# Altium PCB alarm.PcbDoc
Units mil, origin at the board's own origin, x right, y up, seen from the top; angles counter-clockwise.
Board outline 1655 x 625 mil, 2 copper layers (Top Layer, Bottom Layer); 8 components, 6 nets, 19 pads, 2 vias.
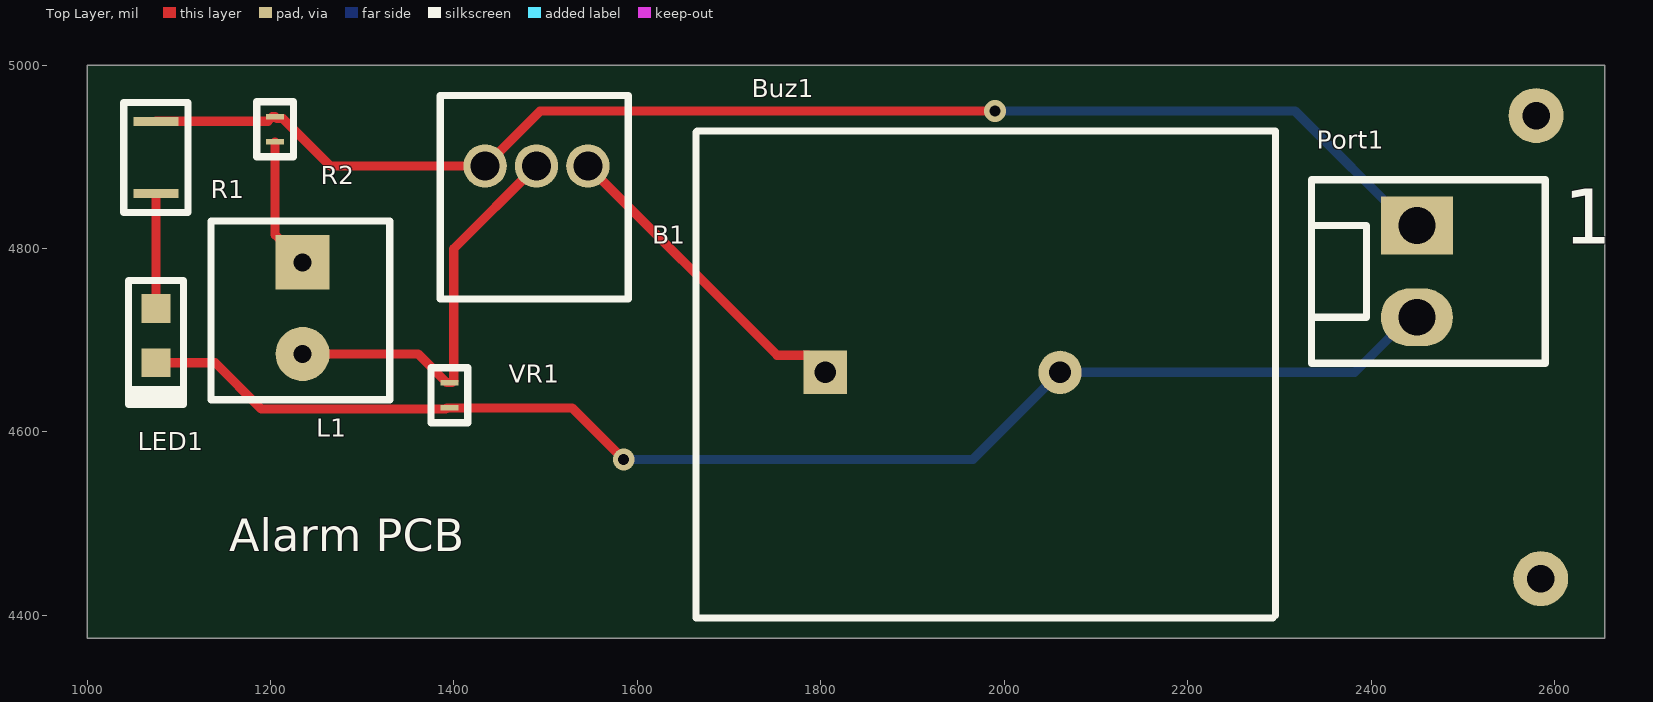
[diagram p0: Top Layer view]
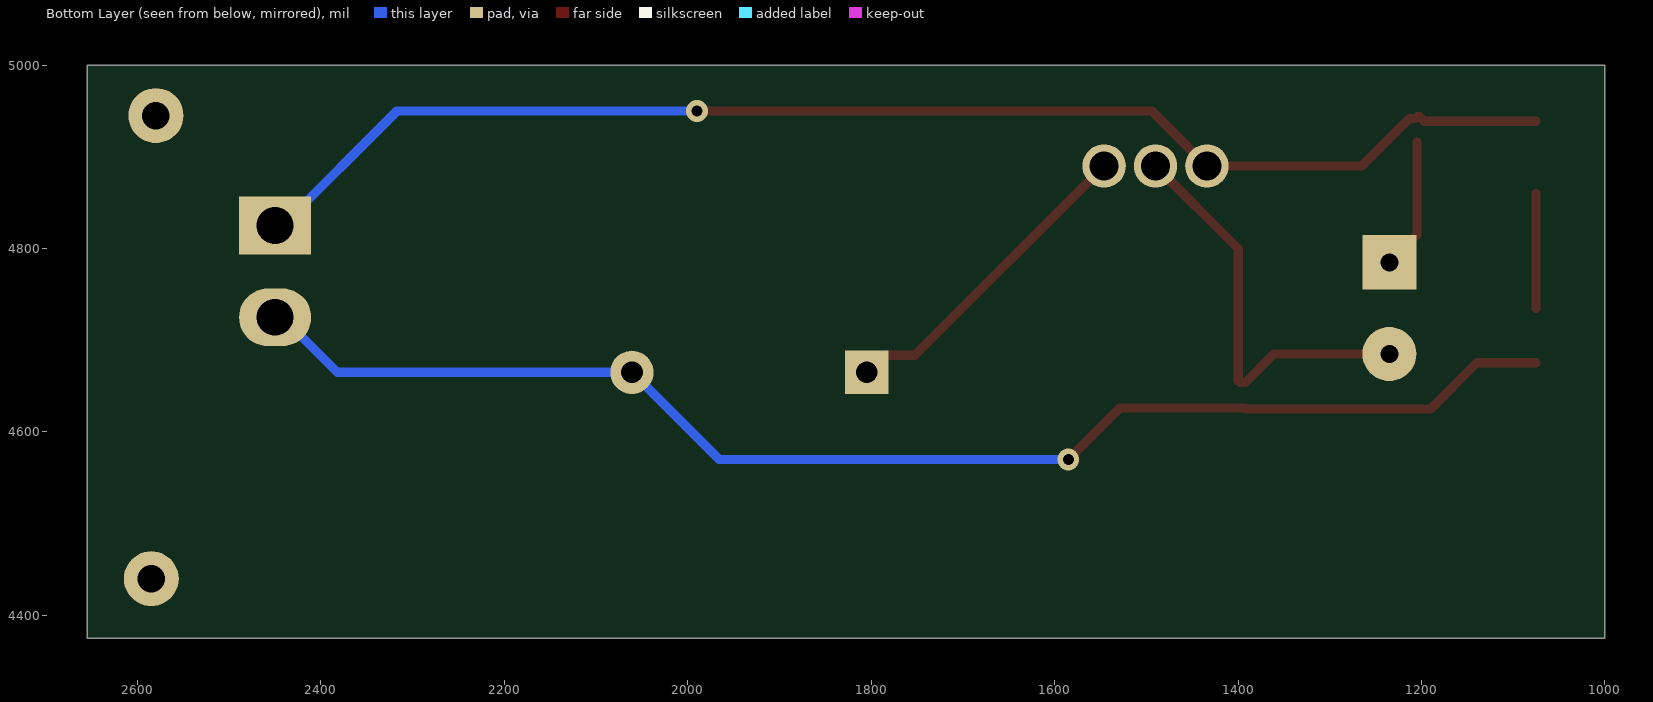
[diagram p1: Bottom Layer view, seen from below]
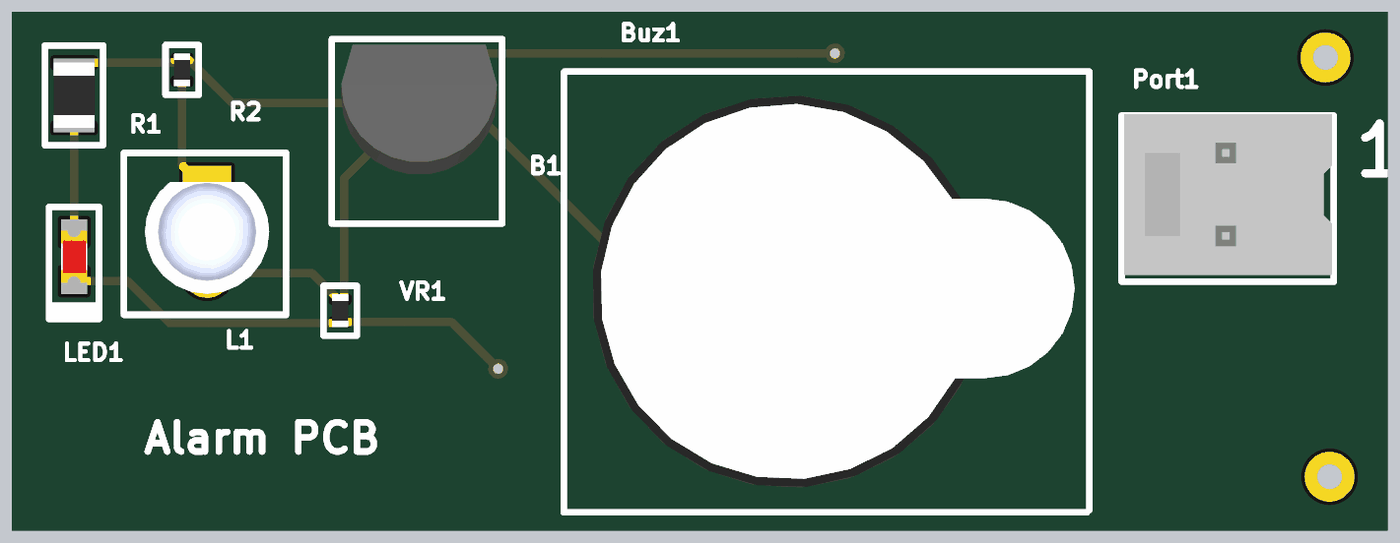
[diagram p2: 3D render of the assembled board from above, using the file's embedded part models]

## Layer stack, top to bottom
Top Solder: solder mask 0.4, Solder Resist, Dk 3.5
Top Layer: signal copper 1.4
Dielectric 1: dielectric 12.6, FR-4, Dk 4.8
Bottom Layer: signal copper 1.4
Bottom Solder: solder mask 0.4, Solder Resist, Dk 3.5

## Board outline
1000,4375 2655,4375 2655,5000 1000,5000

## Design rules (kind name [scope] priority, off if disabled: settings)
Clearance [All] p1: gap=10 ignorepadtopadclearanceinfootprint=FALSE except(0: Arc-Hole Track-Hole SMDPad-Hole THPad-Hole Via-Hole Fill-Hole Poly-Hole Region-Hole Text-Hole)
PolygonConnect [All] p1: connectstyle=Relief reliefconductorwidth=10 reliefentries=4 polygonreliefangle="90 Angle" airgapwidth=10
RoutingVias [All] p1: holewidth=28 width=50 viastyle="Through Hole" minholewidth=28 minwidth=50 maxholewidth=28 maxwidth=50
SolderMaskExpansion [All] p1: expansion=4
Width [All] p1: maxlimit=10 minlimit=10 preferedwidth=10
30 further rules are at their usual default settings.

## Components (designator, comment, footprint, x,y, rotation, side; value= is the part's Value field where it differs from the comment)
B1 "BC557" BJT 1490,4890 r90 top
Buz1 "Buzzer" Buz 1805,4665 r90 top
L1 "L14F1" phototransistor 1235,4785 r0 top
LED1 "Red" LED_red 1075,4705 r90 top
Port1 "Header 1x2" "Port 1x2" 2616,5067 r0 top
R1 "100 Ohms, 1/2W" "R100 - duplicate" 1075,4899.37 r270 top
R2 "1K Ohms" R1K 1205,4930 r270 top
VR1 "VR 50K" R1K 1395,4640 r270 top

## Footprints (in the part's own frame and the unit in brackets; to place one, negate y for a bottom-side part, rotate by r counter-clockwise, add the part's x,y. Pads: shape width x height; smd on the part's side, far side on the other; paste and mask are expansions set on the pad)
BJT [mm]
  round 1.2 hole 0.8: 3(0,1.422) 4(0,0) 5(0,-1.422)
  silkscreen extent -3.68,-2.54 1.96,2.67, body extent -3.37,-2.38 1.81,2.38, height 5.01
Buz [mm]
  rect 1.2x1.2 hole 0.6: 1(0,0)
  round 1.2 hole 0.6: 2(0,-6.5)
  silkscreen extent -6.81,-12.47 6.68,3.58, body extent -6.05,-12.03 5.95,2.72, height 8.56
LED_red [mm]
  rect 0.8x0.8 smd: A(-0.75,0) K(0.75,0)
  silkscreen extent -1.91,-0.76 1.52,0.76, body extent -0.8,-0.4 0.8,0.4, height 0.6
phototransistor [mm]
  rect 1.5x1.5 hole 0.5: 1(0,0)
  round 1.5 hole 0.5: 2(0,-2.54)
  silkscreen extent -2.54,-3.81 2.41,1.14, body extent -1.9,-3.17 1.9,0.26, height 5.21
"Port 1x2" [mm]
  rect 2x1.6 hole 1.02: 1(-4.216,-6.147)
  oval 2x1.6 hole 1.02: 2(-4.216,-8.687)
  silkscreen extent -7.14,-9.96 -0.66,-4.88, body extent -7.06,-9.75 -0.71,-4.83, height 10.68
R1K [mm]
  rect 0.15x0.5 smd: 1(-0.35,0) 2(0.35,0)
  silkscreen extent -0.76,-0.51 0.76,0.51, body extent -0.5,-0.25 0.5,0.25, height 0.34
"R100 - duplicate" [mm]
  rect 0.25x1.25 smd: 1(-1,0) 2(1,0)
  silkscreen extent -1.52,-0.89 1.52,0.89, body extent -1,-0.62 1,0.63, height 0.56

## Part data
B1: library part BC557BRL1G, "Trans GP BJT PNP 45V 0.1A 3-Pin TO-92 T/R", Case/Package=TO-92-3, Collector-emitter Voltage-Max=650mV, Collector Base Voltage (VCBO)=50V, Collector Emitter Breakdown Voltage=45V, Collector Emitter Saturation Voltage=-300mV, Current Rating=-100mA, Emitter Base Voltage (VEBO)=5V, Frequency=320MHz, Manufacturer="ON Semiconductor", Max Collector Current=100mA, Max Operating Temperature=150°C, Max Power Dissipation=625mW, Min Operating Temperature=-55°C, Package Quantity=1, Voltage Rating (DC)=-45V, Category="Discrete Semiconductor Products", Collector Emitter Voltage (VCEO)=45V, ComponentLink1Description=https://datasheet.ciiva.com/976/bc556b-d-976565.pdf?src-supplier=Digi-Key, ComponentLink1URL=https://datasheet.ciiva.com/976/bc556b-d-976565.pdf?src-supplier=Digi-Key, ComponentLink2Description=https://datasheet.ciiva.com/976/bc556b-d-976566.pdf?src-supplier=Digi-Key, ComponentLink2URL=https://datasheet.ciiva.com/976/bc556b-d-976566.pdf?src-supplier=Digi-Key, ComponentLink3Description=https://datasheet.ciiva.com/26816/getdatasheetpartid-53822-26816822.pdf?src-supplier=Verical, ComponentLink3URL=https://datasheet.ciiva.com/26816/getdatasheetpartid-53822-26816822.pdf?src-supplier=Verical, ComponentLink4Description=https://datasheet.ciiva.com/16379/bc556b-d-16379225.pdf?src-supplier=Future+Electronics, ComponentLink4URL=https://datasheet.ciiva.com/16379/bc556b-d-16379225.pdf?src-supplier=Future+Electronics, ComponentLink5Description=https://datasheet.ciiva.com/25996/bc556b-d-25996316.pdf?src-supplier=Avnet+Europe, ComponentLink5URL=https://datasheet.ciiva.com/25996/bc556b-d-25996316.pdf?src-supplier=Avnet+Europe, ComponentLink6Description=https://datasheet.ciiva.com/11204/bc556b-d-11204303.pdf?src-supplier=Avnet, ComponentLink6URL=https://datasheet.ciiva.com/11204/bc556b-d-11204303.pdf?src-supplier=Avnet, Contact Plating=Copper,Tin,Silver, Element Configuration=Single, Gain Bandwidth Product=320MHz, Height=5.33mm, hFE Min=180, Lead Free="Lead Free", Length=5.2mm, Manufacturer Part Number=BC557BRL1G, Max Breakdown Voltage=45V, Max Frequency=320MHz, Number of Elements=1, Number of Pins=3, Packaging="Tape and Reel", Polarity=PNP, Power Dissipation=625mW, Pricing 1="3206 = 0.11076, 3300 = 0.10920, 6500 = 0.10608, 17000 = 0.10374, 33000 = 0.09984, 170000 = 0.09750, 330000 = 0.09516 (USD)", Radiation Hardening=No, REACH SVHC="No SVHC", RoHS=Yes, RoHS Compliant=Yes, Series=-, Stock 1=122273, Supplier 1=Avnet, Supplier Part Number 1=BC557BRL1G, Transition Frequency=320MHz, Width=4.19mm
Buz1: library part AT-1224-TWT-5V-2-R, "AUDIO MAGNETIC XDCR 3-7V TH", Frequency=2.4kHz, Manufacturer="Projects Unlimited", Max Operating Temperature=70°C, Max Supply Current=40mA, Min Operating Temperature=-30°C, Supplier Part Number 1=668-1470-ND, Voltage Rating=5V, Category="Audio Products", ComponentLink1Description=http://www.mouser.com/ds/2/334/AT-1224-TWT-5V-2-R-532234.pdf?src-supplier=Mouser, ComponentLink1URL=http://www.mouser.com/ds/2/334/AT-1224-TWT-5V-2-R-532234.pdf?src-supplier=Mouser, ComponentLink2Description=http://www.puiaudio.com/pdf/AT-1224-TWT-5V-2-R.pdf?src-supplier=Digi-Key, ComponentLink2URL=http://www.puiaudio.com/pdf/AT-1224-TWT-5V-2-R.pdf?src-supplier=Digi-Key, ComponentLink3Description=http://www.puiaudio.com/pdf/AT-1224-TWT-5V-2-R.pdf?src-supplier=Avnet, ComponentLink3URL=http://www.puiaudio.com/pdf/AT-1224-TWT-5V-2-R.pdf?src-supplier=Avnet, Contact Plating=Tin, Diameter=12mm, Height=9mm, Manufacturer Part Number=AT-1224-TWT-5V-2-R, Mount="Through Hole", Operating Supply Current=40mA, Packaging=Tray, Pricing 1="1 = 0.61000, 10 = 0.52000, 25 = 0.48640, 40 = 0.46125, 100 = 0.43680, 500 = 0.38252, 1000 = 0.36032, 4900 = 0.31168 (USD)", RoHS=Yes, Sensing Method=Magnetic, Stock 1=74191, Supplier 1=Digi-Key, Termination="PC Pins"
L1: "Photodarlington Chip Silicon 940nm 3-Pin TO-18 Bulk", Breakdown Voltage=25V, Case/Package=TO-18, Current Rating=7.5mA, Dark Current=100nA, Manufacturer="ON Semiconductor / Fairchild", Max Operating Temperature=125°C, Max Power Dissipation=300mW, Min Operating Temperature=-65°C, Package Quantity=500, Power Dissipation=600mW, Supplier Part Number 1=1021141, Category=Phototransistor, Collector Emitter Breakdown Voltage=25V, Collector Emitter Voltage (VCEO)=25V, ComponentLink1Description=https://datasheet.ciiva.com/4270/l14f1-4270771.pdf?src-supplier=Arrow+Electronics, ComponentLink1URL=https://datasheet.ciiva.com/4270/l14f1-4270771.pdf?src-supplier=Arrow+Electronics, ComponentLink2Description=https://datasheet.ciiva.com/2821/l14f1-20l14f2-2821058.pdf?src-supplier=Digi-Key, ComponentLink2URL=https://datasheet.ciiva.com/2821/l14f1-20l14f2-2821058.pdf?src-supplier=Digi-Key, ComponentLink3Description=https://datasheet.ciiva.com/1249/94970-1249385.pdf?src-supplier=Element14, ComponentLink3URL=https://datasheet.ciiva.com/1249/94970-1249385.pdf?src-supplier=Element14, Fall Time=250us, Lead Free="Lead Free", Manufacturer Part Number=L14F1, Max Collector Current=7.5mA, Mount="Through Hole", Number of Elements=1, Number of Pins=3, Orientation="Top View", Packaging=Bulk, Polarity=NPN, Power Consumption=300mW, Pricing 1="1 = 2.73000, 25 = 1.92000, 100 = 1.33000, 1000 = 1.20000 (GBP)", Rise Time=300us, RoHS=Yes, RoHS Compliant=Yes, Stock 1=0, Supplier 1=Farnell, Viewing Angle=16°, Voltage Rating (DC)=25V, Wavelength=940nm
LED1: library part LTST-C191KRKT, "On a Reel of 5000, 2.4 V Red LED 1608 (0603) SMD, Lite-On LTST-C191KRKT", Case/Package=0603, Case Code (Metric)=1608, Forward Current=30mA, Forward Voltage=2V, Lens Color=Colorless, Manufacturer="Vishay Lite-On", Max Operating Temperature=85°C, Min Operating Temperature=-55°C, Package Quantity=1, Power Dissipation=75mW, Reverse Voltage=5V, Supplier Part Number 1=160-1447-1-ND, Test Current=20mA, Case Code (Imperial)=0603, Category=Optoelectronics, Color=Red, ComponentLink1Description=https://datasheet.ciiva.com/11773/0900766b80dc02b2-11773601.pdf?src-supplier=RSComponents, ComponentLink1URL=https://datasheet.ciiva.com/11773/0900766b80dc02b2-11773601.pdf?src-supplier=RSComponents, ComponentLink2Description=https://datasheet.ciiva.com/16212/ltst-c191krkt-16212419.pdf?src-supplier=Future+Electronics, ComponentLink2URL=https://datasheet.ciiva.com/16212/ltst-c191krkt-16212419.pdf?src-supplier=Future+Electronics, ComponentLink3Description=https://datasheet.ciiva.com/15117/getdatasheetpartid-141922-15117737.pdf?src-supplier=Verical, ComponentLink3URL=https://datasheet.ciiva.com/15117/getdatasheetpartid-141922-15117737.pdf?src-supplier=Verical, ComponentLink4Description=https://datasheet.ciiva.com/12400/lite-on-ltst-c191krkt-190135-12400910.pdf?src-supplier=Mouser, ComponentLink4URL=https://datasheet.ciiva.com/12400/lite-on-ltst-c191krkt-190135-12400910.pdf?src-supplier=Mouser, ComponentLink5Description=https://datasheet.ciiva.com/2109/s-110-ltst-c191krkt-2109970.pdf?src-supplier=Digi-Key, ComponentLink5URL=https://datasheet.ciiva.com/2109/s-110-ltst-c191krkt-2109970.pdf?src-supplier=Digi-Key, ComponentLink6Description=https://datasheet.ciiva.com/2109/s-110-ltst-c191krkt-2109971.pdf?src-supplier=Digi-Key, ComponentLink6URL=https://datasheet.ciiva.com/2109/s-110-ltst-c191krkt-2109971.pdf?src-supplier=Digi-Key, ComponentLink7Description=https://datasheet.ciiva.com/2109/s-110-ltst-c191krkt-2109972.pdf?src-supplier=Digi-Key, ComponentLink7URL=https://datasheet.ciiva.com/2109/s-110-ltst-c191krkt-2109972.pdf?src-supplier=Digi-Key, Depth=0.8mm, Dominant Wavelength=631nm, Height=0.55mm, Illumination Color=Red, Lead Free="Lead Free", Length=1.6mm, Lens Style=Clear,Diffused,Colorless,Rectangular, Lens Transparency=Clear, Luminous Intensity=54mcd, Manufacturer Part Number=LTST-C191KRKT, Mount="Surface Mount", Number of Elements=1, Number of LEDs=1, Number of Pins=2, Packaging="Tape and Reel", Power Rating=75mW, Pricing 1="1 = 0.26000, 10 = 0.14100, 100 = 0.06560, 500 = 0.06060, 1000 = 0.04747, 2000 = 0.04646 (USD)", Radiation Hardening=No, RoHS=Yes, RoHS Compliant=Yes, Stock 1=538127, Supplier 1=Digi-Key, Viewing Angle=130°, Voltage=2V, Wavelength=639nm, Width=0.8mm
Port1: library part 3-641215-2, "CONN HEADER VERT 2POS 2.54MM", Color=Natural,Beige, Contact Current Rating=5A, Contact Resistance=6mR, Flammability Rating="UL94 V-0", Housing Color=White, Manufacturer="TE Connectivity", Max Operating Temperature=221°C, Max Voltage Rating (AC)=250V, Min Operating Temperature=-67°C, Package Quantity=1, Supplier Part Number 1=A30786-ND, Approvals=CSA, Backwall/Post Interruptions="No (Without)", ComponentLink1Description=https://datasheet.ciiva.com/15175/getdatasheetpartid-46728-15175696.pdf?src-supplier=Verical, ComponentLink1URL=https://datasheet.ciiva.com/15175/getdatasheetpartid-46728-15175696.pdf?src-supplier=Verical, ComponentLink2Description=https://datasheet.ciiva.com/19463/751066-19463331.pdf?src-supplier=Jameco, ComponentLink2URL=https://datasheet.ciiva.com/19463/751066-19463331.pdf?src-supplier=Jameco, ComponentLink3Description=https://datasheet.ciiva.com/11747/0900766b80f959d9-11747636.pdf?src-supplier=RSComponents, ComponentLink3URL=https://datasheet.ciiva.com/11747/0900766b80f959d9-11747636.pdf?src-supplier=RSComponents, ComponentLink4Description=https://datasheet.ciiva.com/16210/eng-ds-82056-mta-0608-16210282.pdf?src-supplier=Future+Electronics, ComponentLink4URL=https://datasheet.ciiva.com/16210/eng-ds-82056-mta-0608-16210282.pdf?src-supplier=Future+Electronics, ComponentLink5Description=https://datasheet.ciiva.com/16684/eng-ds-82056-mta-0608-16684998.pdf?src-supplier=Avnet+Europe, ComponentLink5URL=https://datasheet.ciiva.com/16684/eng-ds-82056-mta-0608-16684998.pdf?src-supplier=Avnet+Europe, ComponentLink6Description=https://datasheet.ciiva.com/709/eng-cd-641215-z1-709783.pdf?src-supplier=Digi-Key, ComponentLink6URL=https://datasheet.ciiva.com/709/eng-cd-641215-z1-709783.pdf?src-supplier=Digi-Key, ComponentLink7Description=https://datasheet.ciiva.com/30150/8852eng-ds-82056-mta-0608-30150698.pdf?src-supplier=Onlinecomponents.com, ComponentLink7URL=https://datasheet.ciiva.com/30150/8852eng-ds-82056-mta-0608-30150698.pdf?src-supplier=Onlinecomponents.com, ComponentLink8Description=https://datasheet.ciiva.com/3118/eng-ds-82056-mta-0608-3118187.pdf?src-supplier=Avnet, ComponentLink8URL=https://datasheet.ciiva.com/3118/eng-ds-82056-mta-0608-3118187.pdf?src-supplier=Avnet, Connector System=Wire-to-Board, Connector Type=Plug,Header,Pin, Contact Gender=Male, Contact Material="Copper Alloy", Contact Mating Length=7.49mm, Contact Plating=Gold,Tin,Matte, Contact Post Length=3.56mm, Contact Retention="No (Without)", Contact Shape=Square, Contact Style=Straight, Contact Type="Male Pin", Current Rating=5A, Depth=5.71mm, ELV=Compliant, Fastening Type=Friction, Gender=Male, Height=7.87mm, Housing Material=Polyester, Lead Free="Lead Free", Length=5.08mm, Manufacturer Part Number=3-641215-2, Mating Alignment="No (Without)", Mating Retention="Yes (With)", Mount="Through Hole", Number of Contacts=2, Number of Positions=2, Number of Rows=1, Orientation=Straight, Packaging=Bulk, PCB Mount Alignment="No (Without)", PCB Mounting Orientation=Vertical, PCB Mount Retention=Without, PCB Thickness=0.063inch, Pitch=2.54mm, Plating Thickness=0.76um, Pricing 1="1 = 0.65000, 10 = 0.60800, 100 = 0.46620, 500 = 0.40540, 1000 = 0.33445, 5000 = 0.29391, 10000 = 0.27364 (USD)", Radiation Hardening=No, REACH SVHC="No SVHC", RoHS=Yes, RoHS Compliant=Yes, Sealable="No (Without)", Series=MTA-100, Shrouded="No (Without)", Stock 1=8783, Strain Relief="No (Without)", Supplier 1=Digi-Key, Tail Length=3.56mm, Termination=Solder, Underplate Material=Nickel, Voltage Rating=250V, Voltage Rating (AC)=250V
R1: library part ERJ-P06F1000V, "RESISTOR, SURGE, 0805, 1%, 100R", Case/Package=0805, Case Code (Metric)=2012, Manufacturer=Panasonic, Max Operating Temperature=155°C, Min Operating Temperature=-55°C, Package Quantity=5000, Power Rating=500mW, Resistance=100R, Resistor Type="Thick Film", Supplier Part Number 1=P16057CT-ND, Temperature Coefficient=100ppm/°C, Tolerance=1%, Voltage Rating=150V, Case Code (Imperial)=0805, Category=Resistors, ComponentLink1Description=https://datasheet.ciiva.com/11817/0900766b812cb812-11817182.pdf?src-supplier=RSComponents, ComponentLink1URL=https://datasheet.ciiva.com/11817/0900766b812cb812-11817182.pdf?src-supplier=RSComponents, ComponentLink2Description=https://datasheet.ciiva.com/17208/aoa0000ce4-17208007.pdf?src-supplier=Avnet+Europe, ComponentLink2URL=https://datasheet.ciiva.com/17208/aoa0000ce4-17208007.pdf?src-supplier=Avnet+Europe, ComponentLink3Description=https://datasheet.ciiva.com/7830/1790600-7830815.pdf?src-supplier=Element14, ComponentLink3URL=https://datasheet.ciiva.com/7830/1790600-7830815.pdf?src-supplier=Element14, ComponentLink4Description=https://datasheet.ciiva.com/30103/aoa0000ce4-30103141.pdf?src-supplier=Onlinecomponents.com, ComponentLink4URL=https://datasheet.ciiva.com/30103/aoa0000ce4-30103141.pdf?src-supplier=Onlinecomponents.com, ComponentLink5Description=https://datasheet.ciiva.com/24070/aoa0000ce4-64075-24070038.pdf?src-supplier=Mouser, ComponentLink5URL=https://datasheet.ciiva.com/24070/aoa0000ce4-64075-24070038.pdf?src-supplier=Mouser, ComponentLink6Description=https://datasheet.ciiva.com/48426/erjp-series-eng-tds-48426777.pdf?src-supplier=Distrelec, ComponentLink6URL=https://datasheet.ciiva.com/48426/erjp-series-eng-tds-48426777.pdf?src-supplier=Distrelec, ComponentLink7Description=https://datasheet.ciiva.com/9186/aoa0000ce4-9186922.pdf?src-supplier=Avnet, ComponentLink7URL=https://datasheet.ciiva.com/9186/aoa0000ce4-9186922.pdf?src-supplier=Avnet, ComponentLink8Description=https://datasheet.ciiva.com/22758/1801181-22758282.pdf?src-supplier=Farnell, ComponentLink8URL=https://datasheet.ciiva.com/22758/1801181-22758282.pdf?src-supplier=Farnell, ComponentLink9Description=https://datasheet.ciiva.com/22758/1801181-22758283.pdf?src-supplier=Farnell, ComponentLink9URL=https://datasheet.ciiva.com/22758/1801181-22758283.pdf?src-supplier=Farnell, Contact Plating=Tin, Depth=1.25mm, Height=0.6mm, Length=2mm, Manufacturer Part Number=ERJ-P06F1000V, Military Standard=Not, Mount="Surface Mount", Number of Pins=2, Packaging="Tape and Reel", Pricing 1="1 = 0.18000, 10 = 0.15400, 100 = 0.06030, 1000 = 0.02525, 2500 = 0.02315 (USD)", Radiation Hardening=No, REACH SVHC="No SVHC", RoHS=Yes, RoHS Compliant=Yes, Stock 1=56070, Supplier 1=Digi-Key, Termination=SMD/SMT, Voltage Rating (DC)=150V, Width=1.2mm
R2: library part ERA-2AED102X, "PANASONIC - ERA-2AED102X - SMD Chip Resistor, 0402 [1005 Metric], 1 kohm, ERA2A Series, 50 V, Thin Film, 63 mW", Case/Package=0402, Case Code (Metric)=1005, Manufacturer=Panasonic, Max Operating Temperature=155°C, Max Power Dissipation=63mW, Min Operating Temperature=-55°C, Package Quantity=10000, Power Rating=62.5mW, Resistance=1kR, Resistance Tolerance=0.5%, Resistor Type="Metal Film,Thin Film", Supplier Part Number 1=P1.0KDECT-ND, Temperature Coefficient=25ppm/°C, Voltage Rating=25V, Case Code (Imperial)=0402, Category=Resistors, ComponentLink1Description=https://datasheet.ciiva.com/7942/1776116-7942453.pdf?src-supplier=Element14, ComponentLink1URL=https://datasheet.ciiva.com/7942/1776116-7942453.pdf?src-supplier=Element14, ComponentLink2Description=https://datasheet.ciiva.com/9117/aoa0000ce26-9117222.pdf?src-supplier=Avnet, ComponentLink2URL=https://datasheet.ciiva.com/9117/aoa0000ce26-9117222.pdf?src-supplier=Avnet, ComponentLink3Description=https://datasheet.ciiva.com/46378/1776116-46378236.pdf?src-supplier=Element14, ComponentLink3URL=https://datasheet.ciiva.com/46378/1776116-46378236.pdf?src-supplier=Element14, ComponentLink4Description=https://datasheet.ciiva.com/16784/70068849-16784637.pdf?src-supplier=Allied+Electronics, ComponentLink4URL=https://datasheet.ciiva.com/16784/70068849-16784637.pdf?src-supplier=Allied+Electronics, Construction=Rectangular, Contact Plating=Tin, Depth=0.5mm, Height=0.016inch, Lead Free="Lead Free", Length=1mm, Manufacturer Part Number=ERA-2AED102X, Military Standard=Not, Mount="Surface Mount", Number of Terminations=2, Packaging="Tape and Reel", Pricing 1="1 = 0.19000, 10 = 0.16300, 100 = 0.06360, 1000 = 0.02664, 2500 = 0.02442, 5000 = 0.02220 (USD)", Radiation Hardening=No, REACH SVHC="No SVHC", RoHS=Yes, RoHS Compliant=Yes, Series=ERA-2A, Stock 1=25349, Supplier 1=Digi-Key, Termination=SMD/SMT, Tolerance=0.5%, Voltage Rating (DC)=25V, Weight=2.8E-05oz, Width=0.5mm
VR1: library part PTA3043-2010CIA503, "Slide Potentiometers 50K AUDIO", Manufacturer=Bourns, Max Operating Temperature=50°C, Max Power Dissipation=100mW, Min Operating Temperature=-10°C, Package Quantity=100, Resistance=50kR, Tolerance=20%, Category=Potentiometers, ComponentLink1Description=http://www.alliedelec.com/m/d/212bda907becee0ec46ccb06c3f28298.pdf?src-supplier=Allied+Electronics, ComponentLink1URL=http://www.alliedelec.com/m/d/212bda907becee0ec46ccb06c3f28298.pdf?src-supplier=Allied+Electronics, ComponentLink2Description=http://components.arrow.com/part/dataview/47122089S8814784N1506?src-supplier=Arrow+Electronics, ComponentLink2URL=http://components.arrow.com/part/dataview/47122089S8814784N1506?src-supplier=Arrow+Electronics, ComponentLink3Description=http://www.bourns.com/docs/Product-Datasheets/pta.pdf?src-supplier=Digi-Key, ComponentLink3URL=http://www.bourns.com/docs/Product-Datasheets/pta.pdf?src-supplier=Digi-Key, ComponentLink4Description=http://www.bourns.com/data/global/pdfs/PTA.pdf?src-supplier=Mouser, ComponentLink4URL=http://www.bourns.com/data/global/pdfs/PTA.pdf?src-supplier=Mouser, Depth=9mm, Height=0.256inch, Length=1.772inch, Manufacturer Part Number=PTA3043-2010CIA503, Military Standard=Not, Mount="Through Hole", Packaging=Tray, Power Rating=100mW, Pricing 1="1 = 0.58430 (USD)", RoHS=Yes, RoHS Compliant=Yes, Series="Pro Audio PTA", Stock 1=998, Supplier 1="Arrow Electronics", Supplier Part Number 1=PTA3043-2010CIA503, Taper=Audio, Technology="CARBON FILM", Termination=Pin, Type=Potentiometer, Width=0.354inch

## Free pads (board coordinates)
  round 60 hole 30: 2(2585,4440) 3(2580,4945)

## Via types
v1: diameter 23.62, hole 11.81, Top Layer to Bottom Layer, tented both sides, 2 vias

## Nets (pads, with @x,y where several pads share a name; then routed paths per layer and width w, separated by ;. In a path a pad name is that pad's centre, name@x,y a point inside that pad or via, vN(x,y) a via of type N, cw(c..) or ccw(c..) an arc to the next point about the centre after c; other vN are vias at no path point)
9V: B1.3 Port1.1 R1.1 R2.1 | length 1476
  Top Layer w10: R1.1 1197.17,4938.74 1202.2,4943.78 R2.1 1207.05,4941.73 1213.5,4941.73 1265.23,4890 B1.3 1494,4950 v1(1990,4950)
  Bottom Layer w10: v1(1990,4950) 2317.13,4950 2442.13,4825 Port1.1
buzz: B1.5 Buz1.1 | length 352.2
  Top Layer w10: B1.5 1752.38,4683.62 1786.38,4683.62 Buz1.1
GND: Buz1.2 LED1.A Port1.2 VR1.2 | length 1490.4
  Top Layer w10: LED1.A 1139.53,4675.47 1190,4625 1390.98,4625 1392.2,4626.22 VR1.2 1528.78,4626.22 v1(1585,4570)
  Bottom Layer w10: v1(1585,4570) 1965.91,4570 Buz1.2 2382.13,4665 2442.13,4725 Port1.2 Port1.2@2450,4718.53
par2: B1.4 L1.2 VR1.1 | length 450.1
  Top Layer w10: L1.2 1360.98,4685 1392.2,4653.78 VR1.1 1397.8,4653.78 1399.84,4655.83 1399.84,4799.84 B1.4
res_path1: LED1.K R1.2 | length 125.5
  Top Layer w10: LED1.K R1.2
res_path2: L1.1 R2.2 | length 143.6
  Top Layer w10: R2.2 1205,4815 L1.1

## Polygon pours and split planes (outlines as drawn)
no net on Top Layer "Top Layer-No Net" (solid, pour order 0): 2155,4375

## Silkscreen, mask and mechanical layers (free items; w line width, h text height)
Top Overlay:
  text "Alarm PCB" at 1155,4470 h35.24

## Text inside footprints (layer, text, board x,y; h text height)
Port1: Top Overlay "1" at 2610,4805 h60